# Altium PCB Dev Board.PcbDoc
Units mil, origin at the board's own origin, x right, y up, seen from the top; angles counter-clockwise.
Board outline 2312 x 2186 mil, 2 copper layers (Top Layer, Bottom Layer); 46 components, 71 nets, 229 pads, 70 vias.
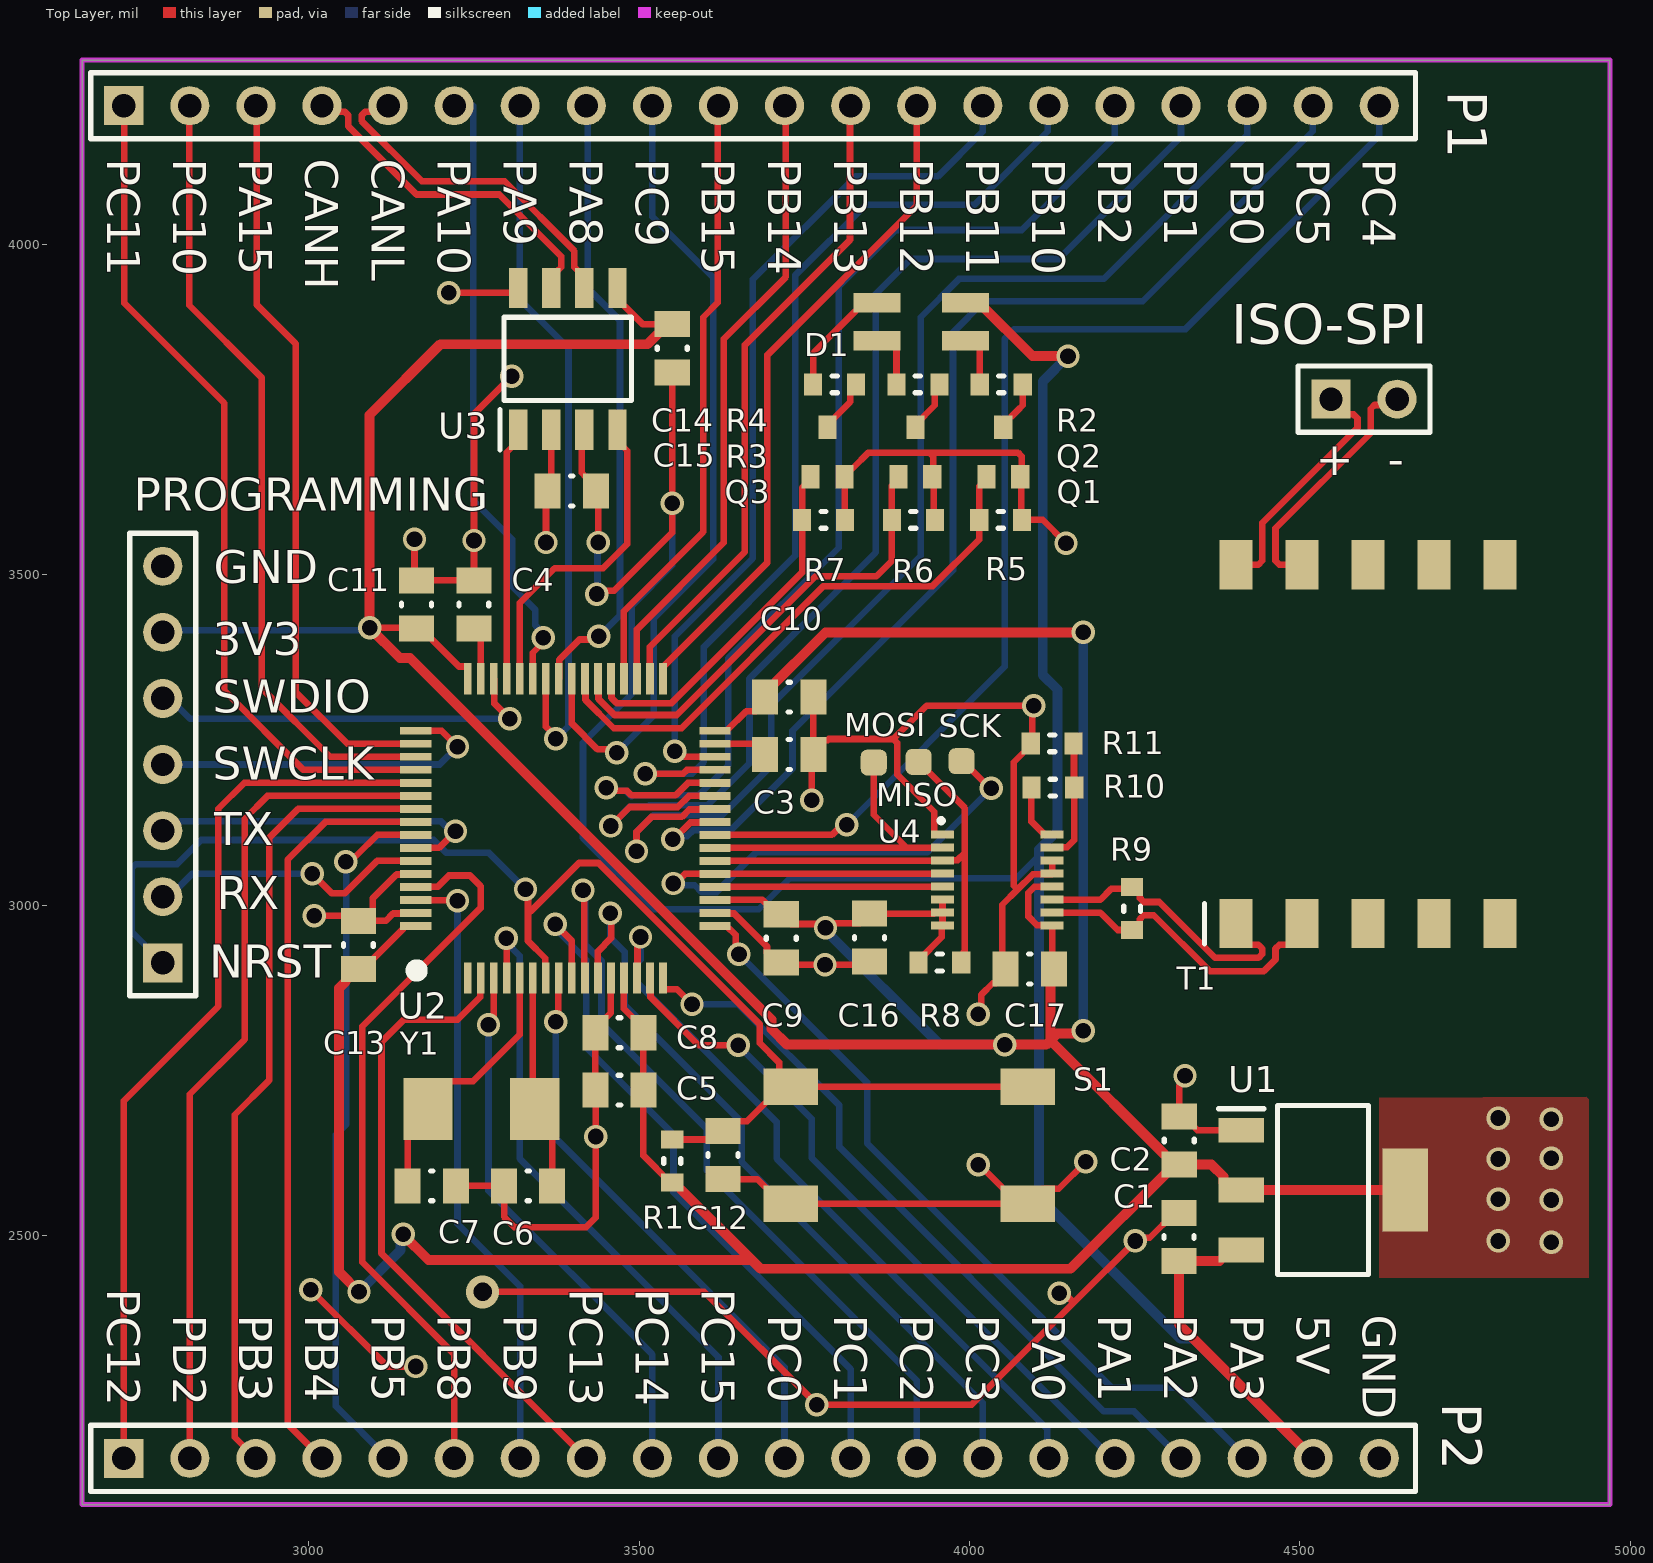
[diagram p0: Top Layer view]
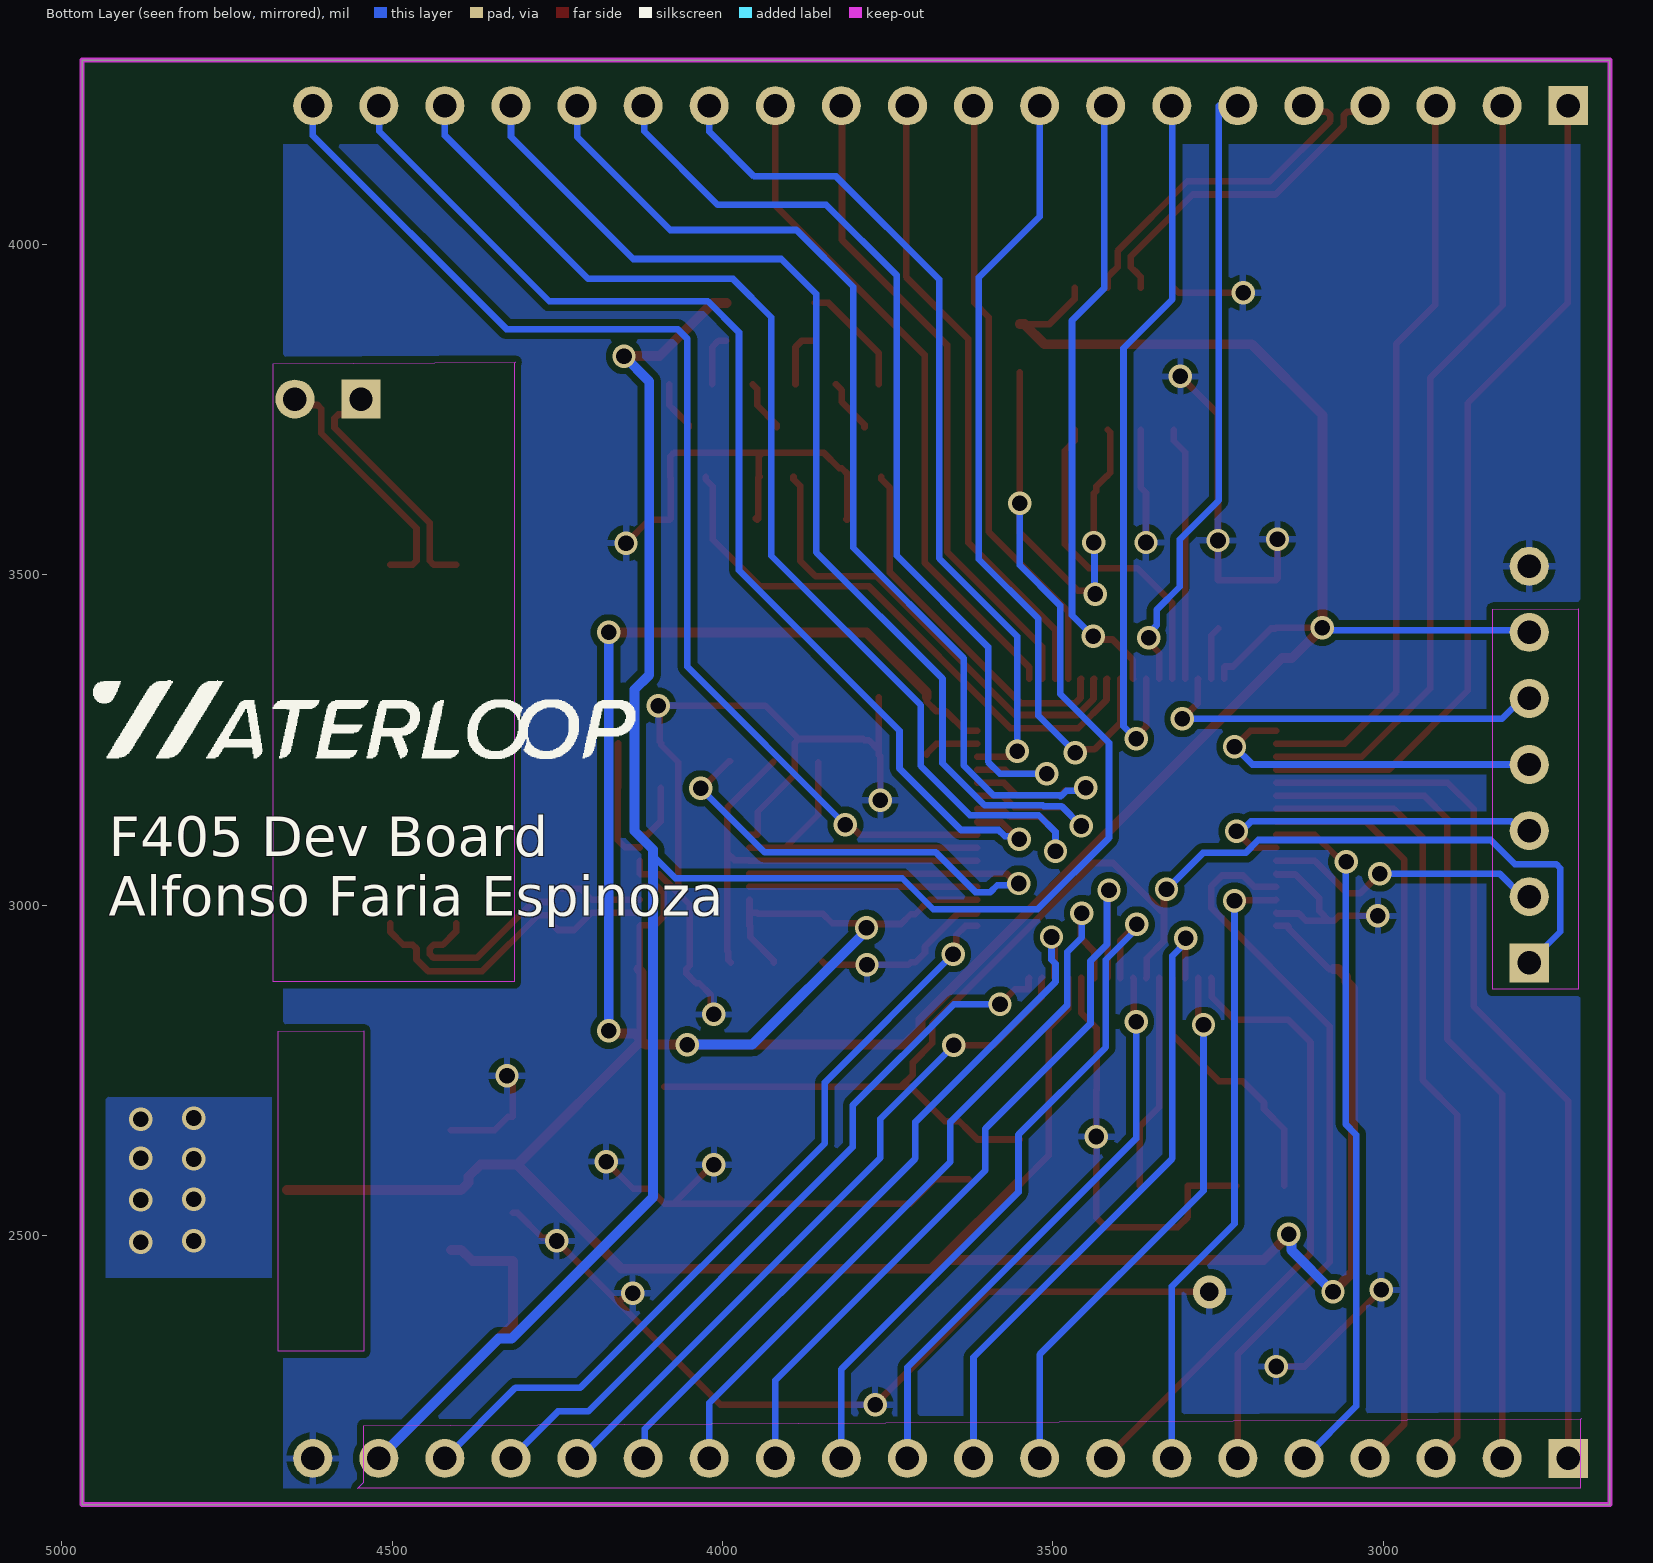
[diagram p1: Bottom Layer view, seen from below]
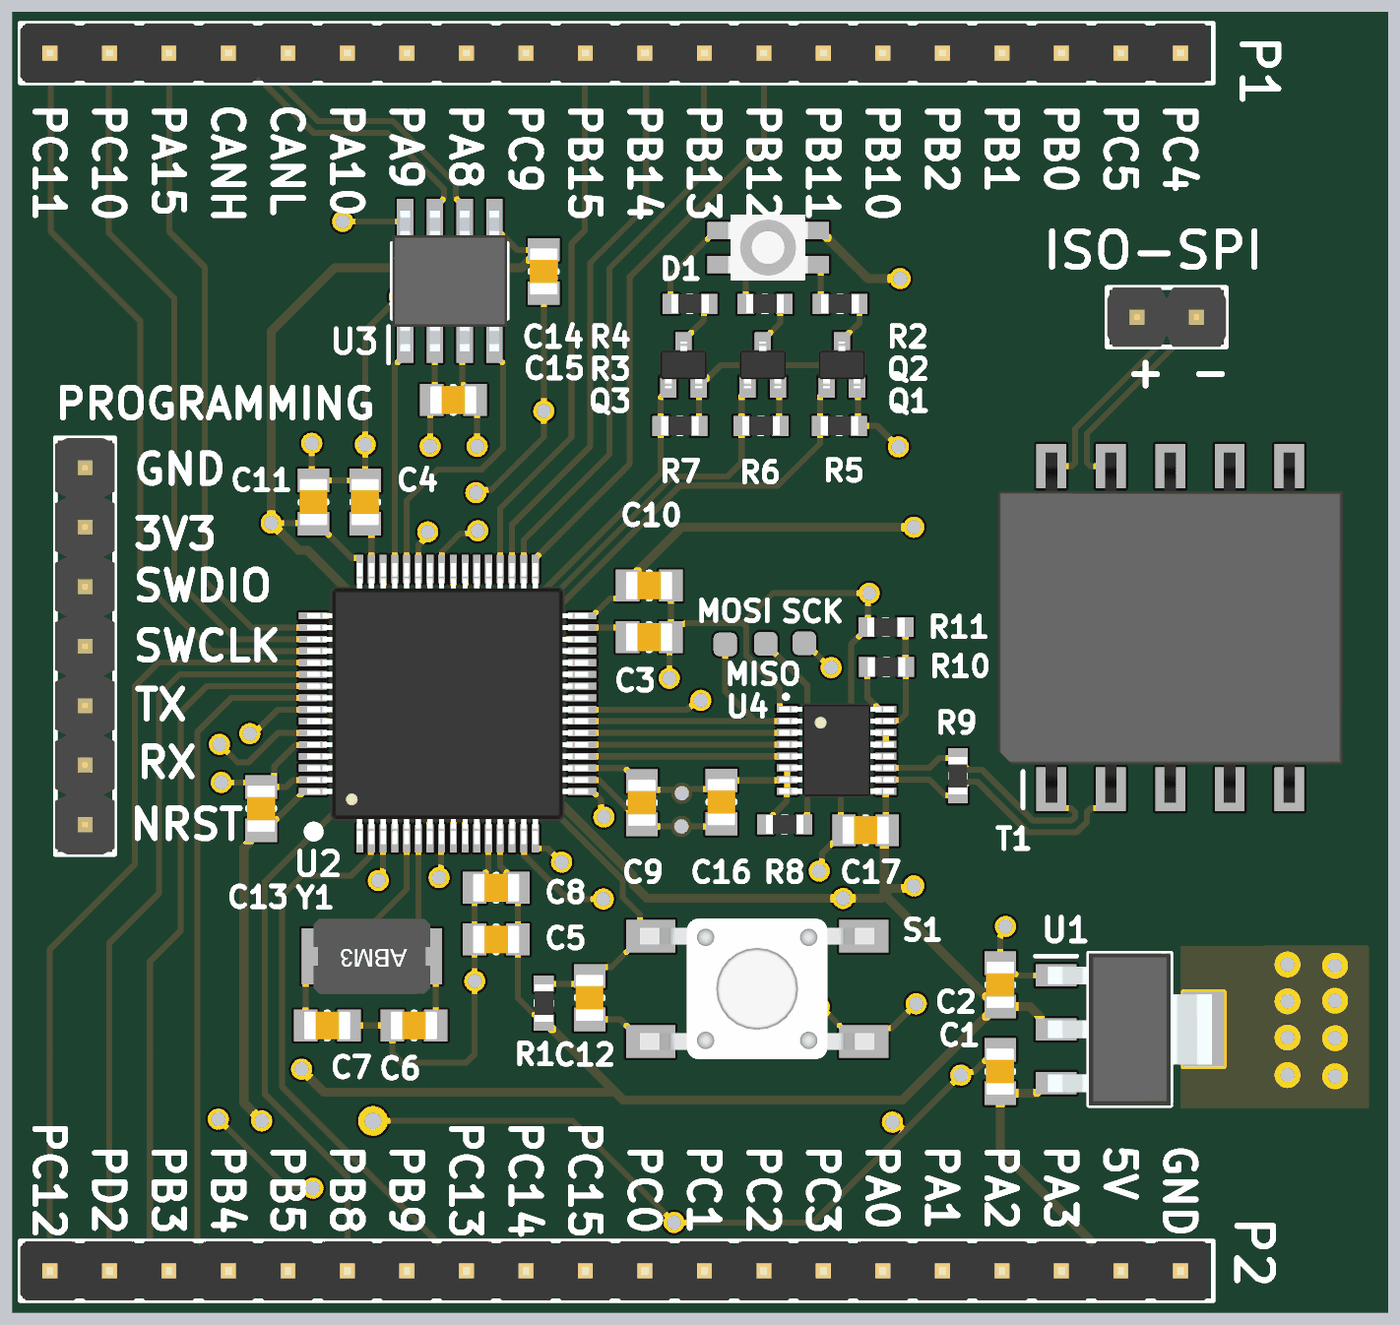
[diagram p2: 3D render of the assembled board from above, using the file's embedded part models]

## Layer stack, top to bottom
Top Solder: solder mask 0.4, Solder Resist, Dk 3.5
Top Layer: signal copper 1.4
Dielectric 1: dielectric 12.6, FR-4, Dk 4.8
Bottom Layer: signal copper 1.4
Bottom Solder: solder mask 0.4, Solder Resist, Dk 3.5

## Board outline
2657,2093 2657,4279 4969,4279 4969,2093

## Design rules (kind name [scope] priority, off if disabled: settings)
Clearance [All] p1: gap=10 ignorepadtopadclearanceinfootprint=FALSE except(0: Arc-Hole Track-Hole SMDPad-Hole THPad-Hole Via-Hole Fill-Hole Poly-Hole Region-Hole Text-Hole; 5: Arc-Arc Arc-Track Track-Track SMDPad-SMDPad; 7.87: Arc-SMDPad Track-SMDPad SMDPad-Fill SMDPad-Poly SMDPad-Region)
DiffPairsRouting [All] p1: maxlimit=10 minlimit=10 mostfreqgap=10 toplayer_minwidth=10 toplayer_maxwidth=15 toplayer_prefwidth=10 bottomlayer_minwidth=10 bottomlayer_maxwidth=15 bottomlayer_prefwidth=10 maxuncoupledlength=500
PolygonConnect PolygonConnect_4 [All vs IsNamedPolygon('3V3_L02_P005')] p1: thpad.connectstyle=Relief thpad.reliefconductorwidth=10 thpad.reliefentries=4 thpad.polygonreliefangle="90 Angle" thpad.airgapwidth=10 smdpad.connectstyle=Relief smdpad.reliefconductorwidth=10 smdpad.reliefentries=4 smdpad.polygonreliefangle="90 Angle" smdpad.airgapwidth=10 via.connectstyle=Direct via.reliefconductorwidth=10 via.reliefentries=4 via.polygonreliefangle="90 Angle" via.airgapwidth=10
PolygonConnect PolygonConnect_3 [All vs IsNamedPolygon('3V3_L01_P002')] p2: thpad.connectstyle=Relief thpad.reliefconductorwidth=10 thpad.reliefentries=4 thpad.polygonreliefangle="90 Angle" thpad.airgapwidth=10 smdpad.connectstyle=Direct smdpad.reliefconductorwidth=10 smdpad.reliefentries=4 smdpad.polygonreliefangle="90 Angle" smdpad.airgapwidth=10 via.connectstyle=Direct via.reliefconductorwidth=10 via.reliefentries=4 via.polygonreliefangle="90 Angle" via.airgapwidth=10
PolygonConnect PolygonConnect_2 [All vs IsNamedPolygon('3V3_L01_P002')] p3: thpad.connectstyle=Relief thpad.reliefconductorwidth=10 thpad.reliefentries=4 thpad.polygonreliefangle="90 Angle" thpad.airgapwidth=10 smdpad.connectstyle=Direct smdpad.reliefconductorwidth=10 smdpad.reliefentries=4 smdpad.polygonreliefangle="90 Angle" smdpad.airgapwidth=10 via.connectstyle=Relief via.reliefconductorwidth=10 via.reliefentries=4 via.polygonreliefangle="90 Angle" via.airgapwidth=10
PolygonConnect [All] p4: connectstyle=Relief reliefconductorwidth=10 reliefentries=4 polygonreliefangle="90 Angle" airgapwidth=10
PolygonConnect PolygonConnect_1 [All] p5: thpad.connectstyle=Relief thpad.reliefconductorwidth=10 thpad.reliefentries=4 thpad.polygonreliefangle="90 Angle" thpad.airgapwidth=10 smdpad.connectstyle=Direct smdpad.reliefconductorwidth=10 smdpad.reliefentries=4 smdpad.polygonreliefangle="90 Angle" smdpad.airgapwidth=10 via.connectstyle=Relief via.reliefconductorwidth=10 via.reliefentries=4 via.polygonreliefangle="90 Angle" via.airgapwidth=10
RoutingVias [All] p1: holewidth=19.68 width=39.37 viastyle="Through Hole" minholewidth=7.87 minwidth=23.62 maxholewidth=28 maxwidth=50
SilkToSolderMaskClearance [IsPad] p1: minsilkscreentomaskgap=5.91 clearancetoexposedcopper=TRUE
SolderMaskExpansion [All] p1: expansion=4 istentingtop=FALSE
Width [All] p1: maxlimit=15 minlimit=10 preferedwidth=15 toplayer_prefwidth=10 minimp=50.000000 maximp=50.000000 favimp=50.000000
28 further rules are at their usual default settings.

## Classes and differential pairs
differential pair class ISO: ISO-SPI
differential pair class CAN: CAN
net class PC[0..15]: PC0 PC1 PC2 PC3 PC4 PC5 PC6 PC7 PC8 PC9 PC10 PC11 PC12 PC13 PC14 PC15
net class PB[0..15]: PB0 PB1 PB2 PB3 PB4 PB5 PB6 PB7 PB8 PB9 PB10 PB11 PB12 PB13 PB14 PB15
net class PA[0..15]: PA0 PA1 PA2 PA3 PA4 PA5 PA6 PA7 PA8 PA9 PA10 PA11 PA12 PA13 PA14 PA15
component class MCU: C3 C4 C5 C6 C7 C8 C9 C10 C11 C12 C13 C14 C15 D1 MISO MOSI Q1 Q2 Q3 R1 R2 R3 R4 R5 R6 R7 S1 SCK U2 U3 Y1
component class Master: C1 C2 C16 C17 ISO-SPI P1 P2 PROGRAMMING R8 R9 R10 R11 T1 U1 U4
differential pair I: +I_P -I_N
differential pair ISO-SPI: +ISO-SPI_P -ISO-SPI_N
differential pair CAN: +CAN_P -CAN_N

## Components (designator, comment, footprint, x,y, rotation, side; value= is the part's Value field where it differs from the comment)
C1 "Capacitor - Nonpolarized" "0805 - Capacitor" 4317,2498 r270 top value=10uF
C2 "Capacitor - Nonpolarized" "0805 - Capacitor" 4317.31,2643.84 r270 top value=10uF
C3 "Capacitor - Nonpolarized" "0805 - Capacitor" 3727.18,3228.22 r180 top value=2.2uF
C4 "Capacitor - Nonpolarized" "0805 - Capacitor" 3249.78,3455.29 r270 top value=2.2uF
C5 "Capacitor - Nonpolarized" "0805 - Capacitor" 3470,2720.22 r180 top value=10nF
C6 "Capacitor - Nonpolarized" "0805 - Capacitor" 3332,2575.38 r0 top value=28pF
C7 "Capacitor - Nonpolarized" "0805 - Capacitor" 3186.16,2575.38 r180 top value=28pF
C8 "Capacitor - Nonpolarized" "0805 - Capacitor" 3470,2807 r180 top value=1uF
C9 "Capacitor - Nonpolarized" "0805 - Capacitor" 3715,2950 r270 top value=0.1uF
C10 "Capacitor - Nonpolarized" "0805 - Capacitor" 3727.18,3315 r0 top value=0.1uF
C11 "Capacitor - Nonpolarized" "0805 - Capacitor" 3163,3455.29 r90 top value=0.1uF
C12 "Capacitor - Nonpolarized" "0805 - Capacitor" 3627,2622 r270 top value=0.1uF
C13 "Capacitor - Nonpolarized" "0805 - Capacitor" 3075,2940 r90 top value=0.1uF
C14 "Capacitor - Nonpolarized" "0805 - Capacitor" 3550,3843 r270 top value=0.1uF
C15 "Capacitor - Nonpolarized" "0805 - Capacitor" 3398,3627 r0 top value=0.1uF
C16 "Capacitor - Nonpolarized" "0805 - Capacitor" 3848.53,2951 r90 top value=0.1uF
C17 "Capacitor - Nonpolarized" "0805 - Capacitor" 4091,2903.62 r0 top value=0.1uF
D1 "RGB LED- Common Anode" "4-PLCC RGB LED" 3927,3883.03 r180 top
ISO-SPI "ISO-SPI" HDR1X2 4547,3766 r0 top (schematic designator P4)
MISO "MISO" "Test Point" 3923,3217 r90 top (schematic designator TP2)
MOSI "MOSI" "Test Point" 3855,3216 r90 top (schematic designator TP3)
P1 "1x20 Header" HDR1X20 2720,4210 r0 top
P2 "1x20 Header" HDR1X20 2720,2163 r0 top
PROGRAMMING "PROGRAMMING" HDR1X7 2779,2913 r90 top (schematic designator P3)
Q1 "MOSFET-N" SC70/SOT323 4051,3686 r180 top value=2N7002
Q2 "MOSFET-N" SC70/SOT323 3918,3686 r180 top value=2N7002
Q3 "MOSFET-N" SC70/SOT323 3785,3686 r180 top value=2N7002
R1 "Resistor" "0603 - Resistor" 3550,2613 r270 top value=10K
R2 "Resistor" "0603 - Resistor" 4048,3788.37 r180 top value=220
R3 "Resistor" "0603 - Resistor" 3921.85,3788.37 r180 top value=220
R4 "Resistor" "0603 - Resistor" 3795.7,3788.37 r180 top value=510
R5 "Resistor" "0603 - Resistor" 4047,3583.31 r180 top value=10K
R6 "Resistor" "0603 - Resistor" 3915,3583.31 r180 top value=10K
R7 "Resistor" "0603 - Resistor" 3779,3583.31 r180 top value=10K
R8 "Resistor" "0603 - Resistor" 3955,2913.46 r180 top value=3K
R9 "Resistor" "0603 - Resistor" 4246,2995 r90 top value=120R
R10 "Resistor" "0603 - Resistor" 4126,3178 r180 top value=3K
R11 "Resistor" "0603 - Resistor" 4125,3245.1 r0 top value=1K
S1 "Switch - Push Button" "6x6mm Switch" 3908.66,2637 r0 top
SCK "CLOCK" "Test Point" 3988,3218 r90 top (schematic designator TP1)
T1 "HM2100NLT" HM2100NLT 4603,3244 r0 top
U1 "TLV1117-33IDCYR" TLV1117 4535,2569 r0 top
U2 "STM32F405RGT6" STM32F405RG 3388.27,3116.38 r0 top
U3 "TJA1051T_3,118" TJA1051T/3,118 3392,3827 r90 top
U4 "LTC6820" LTC6820 4042,3038 r270 top
Y1 "Oscillator" "2-SMD NO LEAD CRSYSTAL" 3261.16,2691.69 r180 top value=ABM3-16.000MHZ-B2-T

## Footprints (in the part's own frame and the unit in brackets; to place one, negate y for a bottom-side part, rotate by r counter-clockwise, add the part's x,y. Pads: shape width x height; smd on the part's side, far side on the other; paste and mask are expansions set on the pad)
"2-SMD NO LEAD CRSYSTAL" [mm]
  rect 1.9x2.4 smd: 1(-2.05,0) 2(2.05,0)
  body extent -2.5,-1.6 2.5,1.6, height 1.3
"4-PLCC RGB LED" [mm]
  rect 1.8x0.75 smd: 1(1.7,-0.725) 2(1.7,0.725) 3(-1.7,0.725) 4(-1.7,-0.725)
  body extent -1.75,-1.4 1.75,1.4, height 1.9
"6x6mm Switch" [mm]
  rect 2.1x1.4 smd: 1(-4.55,2.25) 1(4.55,2.25) 2(-4.55,-2.25) 2(4.55,-2.25)
  body extent -5,-3 5,3, height 5.12
"0603 - Resistor" [mm] "0603 Chip Resistor - IPC Medium Density"
  rect 0.7x0.85 smd: 1(-0.825,0) 2(0.825,0)
  silkscreen extent -0.1,-0.33 0.1,0.33, body extent -0.8,-0.4 0.8,0.4, height 0.45
"0805 - Capacitor" [mm] "0805 Chip Capacitor - IPC Medium Density"
  rect 1x1.35 smd: 1(-0.925,0) 2(0.925,0)
  silkscreen extent -0.05,-0.58 0.05,0.58, body extent -1,-0.6 1,0.6, height 1.2
HDR1X2 [mm] "Connector; Header; 2 Position"
  rect 1.5x1.5 hole 0.9: 1(0,0)
  round 1.5 hole 0.9: 2(2.54,0)
  silkscreen extent -1.27,-1.27 3.81,1.27, body extent -1.27,-1.27 3.81,1.27, height 8.54
HDR1X7 [mm] "Connector; Header; 7 Position"
  rect 1.5x1.5 hole 0.9: 1(0,0)
  round 1.5 hole 0.9: 2(2.54,0) 3(5.08,0) 4(7.62,0) 5(10.16,0) 6(12.7,0) 7(15.24,0)
  silkscreen extent -1.27,-1.27 16.51,1.27, body extent -1.27,-1.27 16.51,1.27, height 8.54
HDR1X20 [mm]
  rect 1.5x1.5 hole 0.9: 1(0,0)
  round 1.5 hole 0.9: 2(2.54,0) 3(5.08,0) 4(7.62,0) 5(10.16,0) 6(12.7,0) 7(15.24,0) 8(17.78,0) 9(20.32,0) 10(22.86,0) 11(25.4,0) 12(27.94,0) 13(30.48,0) 14(33.02,0) 15(35.56,0) 16(38.1,0) 17(40.64,0) 18(43.18,0) 19(45.72,0) 20(48.26,0)
  silkscreen extent -1.27,-1.27 49.66,1.27, body extent -1.27,-1.27 49.53,1.27, height 8.54
HM2100NLT [mm]
  rect 1.27x1.89 smd: 1(-5.08,-6.895) 2(-2.54,-6.895) 3(0,-6.895) 4(2.54,-6.895) 5(5.08,-6.895) 6(5.08,6.895) 7(2.54,6.895) 8(0,6.895) 9(-2.54,6.895) 10(-5.08,6.895)
  silkscreen extent -6.29,-7.69 -6.29,-6.14, body extent -7.35,-7.48 7.35,7.48, height 3.2
LTC6820 [mm]
  rect 0.305x0.889 smd: 1(-1.75,-2.106) 2(-1.25,-2.106) 3(-0.75,-2.106) 4(-0.25,-2.106) 5(0.25,-2.106) 6(0.75,-2.106) 7(1.25,-2.106) 8(1.75,-2.106) 9(1.75,2.106) 10(1.25,2.106) 11(0.75,2.106) 12(0.25,2.106) 13(-0.25,2.106) 14(-0.75,2.106) 15(-1.25,2.106) 16(-1.75,2.106)
  silkscreen extent -2.34,-2.21 -2.24,-2.11, body extent -2,-2.45 2,2.45, height 0.95
SC70/SOT323 [mm]
  rect 0.7x0.9 smd: 1(0.65,0.95) 2(0,-0.95) 3(-0.65,0.95)
  body extent -1,-1 1,1, height 1.05
STM32F405RG [mm]
  rect 0.3x1.2 smd: 1(-3.75,-5.75) 2(-3.25,-5.75) 3(-2.75,-5.75) 4(-2.25,-5.75) 5(-1.75,-5.75) 6(-1.25,-5.75) 7(-0.75,-5.75) 8(-0.25,-5.75) 9(0.25,-5.75) 10(0.75,-5.75) 11(1.25,-5.75) 12(1.75,-5.75) 13(2.25,-5.75) 14(2.75,-5.75) 15(3.25,-5.75) 16(3.75,-5.75) 33(3.75,5.75) 34(3.25,5.75) 35(2.75,5.75) 36(2.25,5.75) 37(1.75,5.75) 38(1.25,5.75) 39(0.75,5.75) 40(0.25,5.75) 41(-0.25,5.75) 42(-0.75,5.75) 43(-1.25,5.75) 44(-1.75,5.75) 45(-2.25,5.75) 46(-2.75,5.75) 47(-3.25,5.75) 48(-3.75,5.75)
  rect 1.2x0.3 smd: 17(5.75,-3.75) 18(5.75,-3.25) 19(5.75,-2.75) 20(5.75,-2.25) 21(5.75,-1.75) 22(5.75,-1.25) 23(5.75,-0.75) 24(5.75,-0.25) 25(5.75,0.25) 26(5.75,0.75) 27(5.75,1.25) 28(5.75,1.75) 29(5.75,2.25) 30(5.75,2.75) 31(5.75,3.25) 32(5.75,3.75) 49(-5.75,3.75) 50(-5.75,3.25) 51(-5.75,2.75) 52(-5.75,2.25) 53(-5.75,1.75) 54(-5.75,1.25) 55(-5.75,0.75) 56(-5.75,0.25) 57(-5.75,-0.25) 58(-5.75,-0.75) 59(-5.75,-1.25) 60(-5.75,-1.75) 61(-5.75,-2.25) 62(-5.75,-2.75) 63(-5.75,-3.25) 64(-5.75,-3.75)
  silkscreen extent -5.79,-5.54 -5.64,-5.39, body extent -6,-6 6,6, height 1.5
"Test Point" [mm] "Test Point"
  rrect50% 1x1 smd: 0(0,0)
TJA1051T/3,118 [mm] "SOIC127P600X175-8N"
  rect 1.55x0.7 smd: 1(-2.725,1.905) 2(-2.725,0.635) 3(-2.725,-0.635) 4(-2.725,-1.905) 5(2.725,-1.905) 6(2.725,-0.635) 7(2.725,0.635) 8(2.725,1.905)
  silkscreen extent -3.5,-2.45 1.6,2.61, body extent -3,-2.45 3,2.45, height 1.75
TLV1117 [mm] "SOT230P700X180-4N"
  rect 1.75x0.95 smd: 1(-3.15,2.3) 2(-3.15,0) 3(-3.15,-2.3)
  rect 1.75x3.2 smd: 2(3.15,0)
  silkscreen extent -4.03,-3.25 1.75,3.25, body extent -3.5,-3.25 3.5,3.25, height 1.8

## Part data
C1 C2 C3 C4 C5 C6 C7 C8 C9 C10 C11 C12 C13 C14 C15 C16 C17: "Nonpolarized Capacitor"
ISO-SPI: library part "1x2 Header", "1x2 Pin Header"
MISO MOSI SCK: library part "Test Point", "Test Point"
P1 P2: "1x20 Pin Header"
PROGRAMMING: library part "1x7 Header", "1x7 Pin Header"
Q1 Q2 Q3: "N-Channel MOSFET"
S1: "Push Button Switch"
T1: "Pulse Transformer 1:1 Surface Mount 150µH, 450µH", Manufacturer="Pulse Electronics", Supplier Part Number=1840-1032-1-ND, Datasheet=https://productfinder.pulseeng.com/doc_type/WEB301/doc_num/HM2100NL/doc_part/HM2100NL.pdf, Manufacturer Part Number=HM2100NLT, Supplier=Digikey
U1: "Linear Voltage Regulator IC 3.3V 800MA SOT223-4", Manufacturer="Texas Instruments", Supplier Part Number=296-21112-1-ND, Datasheet=http://www.ti.com/lit/ds/symlink/tlv1117.pdf?HQS=TI-null-null-digikeymode-df-pf-null-wwe&ts=1590668900314, Manufacturer Part Number=TLV1117-33IDCYR, Supplier=Digikey
U2: "ST 64-pin Micro"
U3: "CAN Transceiver IC 4.5V-5.5V 250ns", Manufacturer=NXP, Manufacturer Part Number=TJA1051T/3,118, Supplier Part Number=568-8684-1-ND, Datasheet=http://www.nxp.com/docs/en/data-sheet/TJA1051.pdf, Supplier=Digikey
U4: Manufacturer="Analog Devices", Manufacturer Part Number=LTC6820IMS#TRPBF, Supplier Part Number=LTC6820IMS#TRPBFCT-ND, Supplier=Digikey
Y1: "Crystal Oscillator"

## Via types
v1: diameter 35.43, hole 23.62, Top Layer to Bottom Layer, 69 vias
v2: diameter 50, hole 28, Top Layer to Bottom Layer, 1 vias

## Nets (pads, with @x,y where several pads share a name; then routed paths per layer and width w, separated by ;. In a path a pad name is that pad's centre, name@x,y a point inside that pad or via, vN(x,y) a via of type N, cw(c..) or ccw(c..) an arc to the next point about the centre after c; other vN are vias at no path point)
3V3: C2.2 C5.1 C8.1 C9.1 C10.1 C11.1 C13.1 C14.1 C16.2 C17.2 PROGRAMMING.6 R1.2 R8.2 U1.2 U2.13 U2.19 U2.32 U2.48 U2.64 U3.5 U4.6 U4.7 U4.8 U4.9 U4.12 | length 8313.3
  Top Layer w10: C13.1 3081.89,2903.58 3143.27,2964.96 3143.27,2967.83 3144.17,2968.74 U2.64 ; v1(3092,3420) 3161.87,3420 C11.1 3169.89,3418.87 3227.38,3361.38 3239.72,3361.38 3240.63,3360.47 U2.48 ; U3.5 3467,3917.55 3505.55,3879 C14.1@3542.69,3879 ; U2.13 3476.85,2843.45 3506.42,2813.89 C8.1 C5.1 3506.42,2621.15 3547.05,2580.52 R1.2 ; C14.1 C14.1@3551,3880.42 ; U2.19 3686.42,3008.11 3708.11,2986.42 C9.1 3729.69,2971.73 3769.27,2971.73 3775.12,2965.88 3788.88,2965.88 3795.73,2972.73 3833.85,2972.73 C16.2 3946.22,2987.42 3947.59,2988.79 U4.7 ; U2.32 3632.36,3264.02 3661.77,3293.43 3676.07,3293.43 3690.76,3308.11 C10.1 ; R8.2 3922.52,2916.42 3958,2951.9 3958,2968.1 3959,2969.1 U4.8 U4.7 ; U4.6 U4.7 ; U4.12 4098.16,3028.16 4089,3019 4089,2982.99 4102.08,2969.91 4124.11,2969.91 U4.9 4124.91,2906.12 C17.2
  Top Layer w15: C13.1 3068.11,2903.58 3055.93,2891.4 3055.93,2884.51 3046,2874.58 3046,2445 v1(3076,2415) ; v1(3143,2502) 3143,2501 3181,2463 3670.47,2463 ; R1.2 3552.95,2580.52 3670.47,2463 ; C14.1 3543.11,3879.42 3542.69,3879 3512.69,3849 3199,3849 3092,3742 v1(3092,3420) 3138,3374 3153.2,3374 3700.22,2826.98 3700.22,2812.78 3724,2789 v1(4053,2789) 4115.99,2789 4122.42,2795.43 ; C10.1 3690.76,3321.89 3781.87,3413 v1(4172,3413) ; C17.2 4122.42,2898.62 4122.42,2795.43 ; v1(4172,2810) 4168.09,2806.09 4133.08,2806.09 4122.42,2795.43 ; U1.2@4659.02,2569 4410.98,2569 4395.24,2569 4384.04,2580.2 4384.04,2589.77 4366.39,2607.42 C2.2 C2.2@4310.42,2607.42 ; 3670.47,2463 3683.47,2450 4153,2450 C2.2@4310.42,2607.42 ; 4122.42,2795.43 C2.2@4310.42,2607.42
  Bottom Layer w10: PROGRAMMING.6 2782.5,3416.5 3088.5,3416.5 v1(3092,3420)
  Bottom Layer w15: v1(3076,2415) 3139.09,2478.09 3139.09,2498.09 v1(3143,2502) ; v1(3782,2965.88) 3782,2962 3955,2789 v1(4053,2789) ; v1(4172,2810) v1(4172,3413)
  other v1: 4880,2490 4800,2492 4880,2554 4800,2555 4800,2616 4880,2617 4880,2676 4800,2678
5V: C1.2 C14.2 C15.2 D1.4 P2.19 U1.3 U3.3 | length 4547.9
  Top Layer w10: U3.3 3413.03,3715.74 3413.03,3654.43 3418.88,3648.57 3419.73,3648.57 3434.42,3633.89 C15.2 3438,3623.42 v1(3438,3549) ; v1(3436,3471) 3440.87,3475.87 3461.87,3475.87 3550,3564 v1(3550,3608.34) C14.2
  Top Layer w15: D1.4 4014.6,3911.57 4095.17,3831 v1(4149,3831) ; U1.3 4395.24,2478.45 4378.37,2461.58 C1.2 4317,2366 P2.19
  Bottom Layer w10: v1(3436,3471) 3437,3472 3437,3548 v1(3438,3549) ; v1(3550,3608.34) 3550,3514.73 3489,3453.73 3489,3320 3415,3246 3415,3102 3523,2994 3681,2994 3728,3041 4071,3041 4105,3075
  Bottom Layer w15: v1(4149,3831) 4110.78,3792.78 4110.78,3348.65 4133,3326.44 4133,3112.5 4105,3084.5 4105,3075 4105,2558.2 4318.77,2344.42 4338.58,2344.42 P2.19
B: Q1.2 R2.1 | length 77.3
  Top Layer w10: Q1.2 4051,3727.34 4073.23,3749.57 4073.41,3749.57 4080.48,3756.64 R2.1
BLUE: Q1.1 R5.2 U2.39 | length 863.8
  Top Layer w10: U2.39 3418.7,3341.85 3418.7,3310.75 3461.45,3268 3564,3268 3779,3483 3944,3483 4014.54,3553.54 R5.2 ; R5.2 4014.52,3633.77 4025.41,3644.66 Q1.1
CAN-RX: U2.44 U3.4 | length 493.5
  Top Layer w10: U2.44 3319.37,3457.37 3372,3510 3445.27,3510 3482,3546.73 3482,3687.98 3467,3702.98 U3.4
CAN-TX: U2.45 U3.1 | length 384.1
  Top Layer w10: U2.45 3299.68,3685.67 3317,3702.98 U3.1
CAN_N: P1.5 U3.6 | length 528.4
  Top Layer w10: P1.5@3109,4195.31 P1.5@3114.86,4201.17 ; P1.5 3111.17,4201.17 3085.86,4201.17 3080,4195.31 3080,4187.03 3171.41,4095.62 3296.45,4095.62 3402,3990.07 3402,3965.65 3407.86,3959.8 3408.22,3959.8 3417,3951.02 U3.6
CAN_P: P1.4 U3.7 | length 520.2
  Top Layer w10: P1.4 3028.83,4201.17 3054.14,4201.17 3060,4195.31 3060,4178.74 3163.13,4075.62 3288.16,4075.62 3382,3981.78 3382,3965.65 3376.14,3959.8 3375.78,3959.8 3367,3951.02 U3.7
G: Q2.2 R3.1 | length 80
  Top Layer w10: Q2.2 3918,3727.34 3947.3,3756.64 3947.3,3781.35 R3.1
GND: C1.1 C2.1 C3.1 C4.1 C5.2 C6.1 C7.1 C8.2 C9.2 C10.2 C11.2 C12.2 C13.2 C15.1 C16.1 C17.1 P2.20 PROGRAMMING.7 Q1.3 Q2.3 Q3.3 R5.1 R6.1 R7.1 R11.1 S1.2 U1.1 U2.12 U2.18 U2.60 U2.63 U3.2 U3.8 U4.1 U4.13 U4.14 | length 6227.1
  Top Layer w10: v1(3003,2418) 3119,2302 v1(3162,2302) ; v1(3008,2984) 3067.42,2984 C13.2 C13.2@3081.89,2976.42 ; v1(3160,3554) 3160,3494.7 C11.2 C4.1 3250,3491.92 v1(3250,3552) 3250,3743.34 v1(3307,3800.34) ; U2.63 3160.98,2987.52 3127.68,2987.52 3116.57,2976.42 C13.2@3081.89,2976.42 ; U2.60 3160.98,3046.57 3132.94,3046.57 3096.57,3010.21 3096.57,2991.1 C13.2@3081.89,2976.42 ; v1(3212,3927) 3309.72,3927 U3.8 ; C7.1 C6.1 3295.58,2528.42 3311,2513 3420,2513 3434,2527 v1(3434,2650) 3434,2719.8 C5.2 C8.2 3433.58,2813.89 3457.17,2837.47 U2.12 ; v2(3263,2415) 3598.34,2415 v1(3769,2244.34) 4003.34,2244.34 4160,2401 ; v1(3359,3549) 3359,3624.42 C15.1 3367,3632.42 U3.2 ; U2.18 3615.55,2987.52 3643.6,2987.52 3693.43,2937.69 3693.43,2928.27 3708.11,2913.58 C9.2 3718.58,2910 3843.95,2910 C16.1 ; C12.2 3678.58,2585.58 3715.75,2548.42 3729.53,2548.42 S1.2@4074.02,2548.42 ; v1(3761,3159) 3761,3225.63 C3.1 C3.1@3763.59,3235.11 ; C10.2 C3.1@3763.59,3235.11 ; R7.1@3812.24,3584.07 R7.1 3811.04,3583.76 3811.04,3648.15 Q3.3 3810.59,3652.54 3819.37,3661.32 3823.31,3661.32 3846.99,3685 3939.14,3685 ; R6.1@3949.44,3585.27 R6.1 3945.54,3585.26 3945.54,3646.65 Q2.3 3945,3650.01 3945,3679.14 3939.14,3685 ; U4.1 3947.59,3106.9 3946.59,3107.9 3946.59,3141.6 3890.44,3197.75 3890.44,3245.7 3884.58,3251.56 ; v1(4013,2607.34) 4015.09,2607.34 S1.2@4074.02,2548.42 ; v1(4013,2835) 4017.87,2839.87 4017.87,2864.87 4035.05,2882.05 4039.9,2882.05 4054.58,2896.73 C17.1 4049.58,2908.62 4049.58,3000.8 4072.7,3023.92 ; U4.14 U4.13 4124.11,3047.04 4095.82,3047.04 4072.7,3023.92 ; v1(4136,2413) 4142.88,2413 4154.88,2401 4160,2401 ; v1(4146,3548) 4110.69,3583.31 R5.1 4078.04,3584.76 4078.04,3647.15 4079,3648.12 4079,3679.14 4073.14,3685 3939.14,3685 ; v1(4176,2612) 4134.98,2570.98 4110.36,2570.98 4087.8,2548.42 S1.2@4074.02,2548.42 ; C1.1 4310.11,2534.42 4272.56,2496.87 4255.87,2496.87 v1(4251,2492) 4160,2401 ; v1(4326,2742) 4326,2735.12 4317.31,2726.43 C2.1 4324.2,2680.25 4344.91,2659.55 U1.1 ; C3.1@3763.59,3235.11 3778.28,3249.79 3785.17,3249.79 3786.93,3251.56 3884.58,3251.56 ; 3884.58,3251.56 3935.02,3302 v1(4097,3302) 4094.76,3299.76 4094.76,3247.34 R11.1 4092.52,3242.14 4066.87,3216.49 4066.87,3029.75 4072.7,3023.92
  other v1: 3781.27,2910
GREEN: Q2.1 R6.2 U2.38 | length 712.9
  Top Layer w10: U2.38 3438.39,3341.85 3438.39,3312.27 3462.66,3288 3557,3288 3767,3498 3859,3498 3882.52,3521.52 R6.2 3882.52,3634.77 3892.41,3644.66 Q2.1
I_N: R9.1 T1.2 U4.10 | length 484.7
  Top Layer w10: U4.10 4198,2988.79 4224.27,2962.52 R9.1 4248.95,2962.52 4257.73,2971.3 4257.73,2979.14 4263.59,2985 4278.84,2985 4363.5,2900.34 4445.43,2900.34 4463,2917.91 4463,2934.48 4468.86,2940.34 4483,2940.34 4503,2960.34 T1.2
I_P: R9.2 T1.1 U4.11 | length 448.6
  Top Layer w10: U4.11 4198,3008.47 4214.27,3024.74 4243.26,3024.74 R9.2 4248.95,3027.48 4257.73,3018.7 4257.73,3010.86 4263.59,3005 4287.13,3005 4371.79,2920.34 4437.14,2920.34 4443,2926.2 4443,2934.48 4437.14,2940.34 4423,2940.34 4403,2960.34 T1.1
ISO-SPI_N: ISO-SPI.2 T1.9 | length 378.2
  Top Layer w10: T1.9 4468.86,3515.46 4463,3521.31 4463,3570.44 4607,3714.44 4607,3751.31 4612.86,3757.17 4638.17,3757.17 ISO-SPI.2
ISO-SPI_P: ISO-SPI.1 T1.10 | length 369.7
  Top Layer w10: T1.10 4437.14,3515.46 4443,3521.31 4443,3578.73 4587,3722.73 4587,3736.94 4581.14,3742.8 4570.2,3742.8 ISO-SPI.1
NetC3_2: C3.2 U2.31 | length 83.6
  Top Layer w10: U2.31 3676.07,3244.33 3690.76,3229.65 C3.2
NetC4_2: C4.2 U2.47 | length 80.5
  Top Layer w10: C4.2 3260.31,3408.34 U2.47
NetD1_1: D1.1 R4.2 | length 175.4
  Top Layer w10: R4.2 3763.22,3835.39 3839.4,3911.57 D1.1
NetD1_2: D1.2 R3.2 | length 89.7
  Top Layer w10: D1.2 3879.6,3854.48 3889.37,3844.72 R3.2
NetD1_3: D1.3 R2.2 | length 82
  Top Layer w10: D1.3 4005.76,3854.48 4015.52,3844.72 R2.2
NetR8_1: MISO.0 R8.1 U2.22 U4.3 | length 718.2
  Top Layer w10: U2.22 3614.83,3067.35 3958.91,3067.35 U4.3 3959.89,3068.33 3981.92,3068.33 3993,3079.42 ; MISO.0 3993,3147 3993,3079.42 ; R8.1 3991.27,2917.25 3991.27,2929.32 3993,2931.05 3993,3079.42
NetR10_1: R10.1 R11.2 U4.15 | length 185.1
  Top Layer w10: U4.15 4125.72,3088.02 4147.75,3088.02 4158.48,3098.75 R10.1 4157.98,3178.5 4157.98,3244.6 R11.2
NetR10_2: R10.2 U4.16 | length 90.8
  Top Layer w10: R10.2 4093.52,3126.8 4113.42,3106.9 U4.16
NetTP1_0: SCK.0 U2.21 U4.4 | length 1027.8
  Top Layer w10: v1(3551.44,3033) 3554.88,3033 3569.36,3047.48 U2.21 3614.83,3047.66 3958.91,3047.66 U4.4 ; SCK.0 3990,3218 4031,3177 v1(4033,3177)
  Bottom Layer w10: v1(3551.44,3033) 3554.16,3030.28 3584.16,3030.28 3594.44,3020 3617,3020 3677,3080 3936,3080 v1(4033,3177)
NetTP3_0: MOSI.0 U2.23 U4.2 | length 494.3
  Top Layer w10: U2.23 3614.83,3087.03 3904.97,3087.03 ; MOSI.0 3855,3137 3904.97,3087.03 ; U4.2 3958.91,3087.03 3904.97,3087.03
NetU2_20: U2.20 U4.5 | length 344.6
  Top Layer w10: U2.20 3614.83,3027.98 3958.91,3027.98 U4.5
OSC-IN: C6.2 U2.6 Y1.1 | length 326.8
  Top Layer w10: U2.6 3339.06,2694.51 Y1.1 3368.42,2665.14 C6.2
OSC-OUT: C7.2 U2.5 Y1.2 | length 406
  Top Layer w10: C7.2 3149.75,2660.98 Y1.2 3180.45,2701.53 3212.86,2733.93 3248.93,2733.93 3319.37,2804.37 U2.5
PA0: P2.15 U2.14 | length 1114.2
  Top Layer w10: U2.14 3497.44,2890.91 3497.44,2947.44 v1(3502,2952)
  Bottom Layer w10: v1(3502,2952) 3502,2917.56 3496,2911.56 3496,2884 3708,2672 3708,2617 4117.47,2207.53 4117.47,2165.53 P2.15
PA1: P2.16 U2.15 | length 1055.9
  Top Layer w10: U2.15 3517.13,2889.09 3517.13,2861.05 3590.17,2788 v1(3650,2788)
  Bottom Layer w10: v1(3650,2788) 3761,2677 3761,2618 4216,2163 P2.16
PA2: P2.17 U2.16 | length 1131.5
  Top Layer w10: U2.16 3536.81,2889.09 3536.81,2873.13 3556.87,2873.13 v1(3580,2850)
  Bottom Layer w10: v1(3580,2850) 3650,2850 3803,2697 3803,2634 4203,2234 4249,2234 P2.17
PA3: P2.18 U2.17 | length 1207.1
  Top Layer w10: U2.17 3632.36,2968.74 3646.13,2954.97 3646.13,2930.87 v1(3651,2926)
  Bottom Layer w10: v1(3651,2926) 3845,2732 3845,2640 4215,2270 4313,2270 P2.18
PA8: P1.8 U2.41 | length 932.4
  Top Layer w10: U2.41 3379.33,3343.66 3379.33,3371.71 3409.75,3402.13 3434.13,3402.13 v1(3439,3407)
  Bottom Layer w10: P1.8@3422,4202.24 3422,3934 3471,3885 3471,3439 v1(3439,3407)
PA9: P1.7 U2.42 | length 1095.2
  Top Layer w10: U2.42 3358.74,3270.57 3374,3255.31 v1(3374,3252)
  Bottom Layer w10: P1.7@3319,4211.57 3319,3917 3393,3843 3393,3271 v1(3374,3252)
PA10: P1.6 U2.43 | length 917.8
  Top Layer w10: U2.43 3339.06,3382.17 3355,3398.12 v1(3355,3405)
  Bottom Layer w10: P1.6@3249,4210 3249,3612.73 3308,3553.73 3308,3482 3343,3447 3343,3423.57 3355,3411.57 v1(3355,3405)
PA15: P1.3 U2.50 | length 1127.4
  Top Layer w10: P1.3@2921,4211.51 2921,3909 2980,3850 2980,3323 3058.67,3244.33 U2.50
PB0: P1.18 U2.26 | length 1862
  Top Layer w10: v1(3496,3082) 3496,3111 3518.72,3133.72 3564.62,3133.72 3575.91,3145 3613.74,3145 U2.26
  Bottom Layer w10: v1(3496,3082) 3496,3111 3521.28,3136.28 3625.28,3136.28 3700,3211 3700,3303 3926,3529 3926,3890 3984,3948 4203,3948 4420,4165 P1.18
PB1: P1.17 U2.27 | length 1822.6
  Top Layer w10: v1(3457,3120) 3485.72,3148.72 3558.41,3148.72 3575.29,3165.59 U2.27
  Bottom Layer w10: v1(3457,3120) 3487.09,3150.09 3513.87,3150.09 3515.07,3151.28 3603.28,3151.28 3667,3215 3667,3343 3858,3534 3858,3925 3911,3978 4135,3978 4320,4163 P1.17
PB2: P1.16 U2.28 | length 1739.3
  Top Layer w10: v1(3450,3178) 3454.87,3173.13 3481.75,3173.13 3488.6,3166.28 3554.76,3166.28 3573.76,3185.28 U2.28
  Bottom Layer w10: v1(3450,3178) 3454.87,3173.13 3479.67,3173.13 3487.72,3165.09 3488.87,3165.09 3490.07,3166.28 3589.28,3166.28 3635,3212 3635,3374 3802,3541 3802,3936 3888,4022 4079,4022 4220,4163 P1.16
PB3: P2.3 U2.55 | length 1213.9
  Top Layer w10: P2.3 2888,2195 2888,2683 2940,2735 2940,3102 2983.91,3145.91 U2.55
PB4: P2.4 U2.56 | length 1145.1
  Top Layer w10: P2.4 2968,2215 2968,3069 3025.22,3126.22 U2.56
PB5: P2.5 U2.57 | length 1065.7
  Top Layer w10: v1(3056,3066) 3062.88,3066 3072.52,3075.63 3072.63,3075.63 3103.54,3106.54 U2.57
  Bottom Layer w10: v1(3056,3066) 3057,3065 3057,2668.84 3040.72,2652.56 3040.72,2242.28 P2.5
PB8: P2.6 U2.61 | length 1109.6
  Top Layer w10: U2.61 3194.8,3027.8 3212,3045 3244,3045 3260,3029 3260,2995.73 3081,2816.73 3081,2460 3220,2321 P2.6
PB9: P2.7 U2.62 | length 946.9
  Top Layer w10: U2.62 3162.44,3007.56 3224.44,3007.56 v1(3225,3007)
  Bottom Layer w10: v1(3225,3007) 3225,2518 3320,2423 P2.7
PB10: P1.15 U2.29 | length 1509.9
  Top Layer w10: v1(3509,3199) 3566.27,3199 3572.23,3204.96 U2.29
  Bottom Layer w10: v1(3509,3199) 3580,3199 3598,3217 3598,3391 3736,3529 3736,3953 3843,4060 4007,4060 4118.33,4171.33 4118.33,4208.33 P1.15
PB11: P1.14 U2.30 | length 1306.8
  Top Layer w10: v1(3554,3233) 3560.88,3233 3569.24,3224.65 U2.30
  Bottom Layer w10: v1(3554,3233) 3554,3407 3672,3525 3672,3947 3828,4103 3952,4103 4020,4171 P1.14
PB12: P1.13 U2.33 | length 1012.6
  Top Layer w10: U2.33 3535.91,3360.47 3694,3518.57 3694,3833 3920,4059 P1.13@3920,4196.26
PB13: P1.12 U2.34 | length 981.7
  Top Layer w10: U2.34 3516.22,3391.22 3660,3535 3660,3848 3819,4007 P1.12@3819,4199.03
PB14: P1.11 U2.35 | length 953.7
  Top Layer w10: U2.35 3496.54,3417.54 3628,3549 3628,3857 3722,3951 P1.11@3722,4203.1
PB15: P1.10 U2.36 | length 923.8
  Top Layer w10: U2.36 3476.85,3444.85 3597,3565 3597,3890 3619,3912 P1.10@3619,4207.63
PC0: P2.11 U2.8 | length 872.2
  Top Layer w10: v1(3374,2824) 3377.52,2827.52 3377.52,2889.09 U2.8
  Bottom Layer w10: v1(3374,2824) 3374,2647 3720,2301 P2.11
PC1: P2.12 U2.9 | length 1084.6
  Top Layer w10: v1(3373,2971) 3398.11,2945.89 U2.9
  Bottom Layer w10: v1(3373,2971) 3373,2964.52 3420,2917.52 3420,2785 3552,2653 3552,2566 3820,2298 P2.12
PC2: P2.13 U2.10 | length 1203.3
  Top Layer w10: v1(3415,3023) 3416.89,3021.11 3416.89,2890.91 U2.10
  Bottom Layer w10: v1(3415,3023) 3418,3020 3418,2940.73 3443,2915.73 3443,2821 3602,2662 3602,2599 3920,2281 P2.13
PC3: P2.14 U2.11 | length 1165.5
  Top Layer w10: U2.11 3437.48,2930.25 3457.51,2950.28 3457.51,2986.49 v1(3456,2988)
  Bottom Layer w10: v1(3456,2988) 3456,2951.73 3478,2929.73 3478,2849 3655,2672 3655,2612 4020,2247 P2.14
PC4: P1.20 U2.24 | length 1779.3
  Top Layer w10: U2.24 3791.65,3106.54 3807.12,3122 v1(3814,3122)
  Bottom Layer w10: v1(3814,3122) 4053,3361 4053,3857 4068,3872 4327,3872 4620,4165 P1.20
PC5: P1.19 U2.25 | length 1769.8
  Top Layer w10: v1(3551,3100) 3552.12,3100 3577.44,3125.32 3613.74,3125.32 U2.25
  Bottom Layer w10: v1(3551,3100) 3555.63,3104.63 3572.63,3104.63 3582,3114 3639,3114 3732,3207 3732,3264 3975,3507 3975,3867 4022,3914 4262,3914 4519.33,4171.33 4519.33,4209.33 P1.19
PC9: P1.9 U2.40 | length 1228.4
  Top Layer w10: U2.40 3398.11,3274.89 3437.13,3235.87 3461.13,3235.87 v1(3466,3231)
  Bottom Layer w10: v1(3466,3231) 3522,3287 3522,3433.79 3612,3523.79 3612,3950 3520,4042 P1.9@3520,4206.88
PC10: P1.2 U2.51 | length 1196.8
  Top Layer w10: P1.2@2819,4203.56 2819,3908 2929,3798 2929,3328 3032.35,3224.65 U2.51
PC11: P1.1 U2.52 | length 1281.4
  Top Layer w10: P1.1@2721,4204.28 2721,3911 2872,3760 2872,3325 2992.04,3204.96 U2.52
PC12: P2.1 U2.53 | length 1357.4
  Top Layer w10: P2.1 2720,2704 2863,2847 2863,3146 2902.28,3185.28 U2.53
PC13: P2.8 U2.2 | length 965.3
  Top Layer w10: U2.2 3259.41,2889.09 3259.41,2861.05 3225.36,2827 3144,2827 3110,2793 3110,2473 P2.8
PC14: P2.9 U2.3 | length 833
  Top Layer w10: v1(3272,2819) 3272,2825.88 3280,2833.88 U2.3
  Bottom Layer w10: v1(3272,2819) 3272,2568 3520,2320 P2.9
PC15: P2.10 U2.4 | length 980.2
  Top Layer w10: v1(3299,2950) 3299.34,2949.66 3299.34,2890.34 U2.4
  Bottom Layer w10: v1(3299,2950) 3299,2943.73 3319,2923.73 3319,2617 3620,2316 P2.10
PD2: P2.2 U2.54 | length 1275.6
  Top Layer w10: P2.2 2820,2714 2903,2797 2903,3131 2937.59,3165.59 U2.54
R: Q3.2 R4.1 | length 82.9
  Top Layer w10: Q3.2 3785,3727.34 3819.4,3761.74 3819.4,3779.59 R4.1
RED: Q3.1 R7.2 U2.37 | length 553.2
  Top Layer w10: U2.37 3458.07,3341.85 3458.07,3313.8 3465.87,3306 3549,3306 3746.52,3503.52 R7.2 3746.52,3631.77 3759.41,3644.66 Q3.1
RESET: C12.1 PROGRAMMING.1 R1.1 S1.1 U2.7 | length 2120.7
  Top Layer w10: v1(3328,3024) 3331.72,3020.28 3331.72,2993.84 3331.72,2990.85 3331.72,2946.02 3357.83,2919.9 3357.83,2890.91 U2.7 ; 3332.87,2993.84 3335.43,2991.28 3336.28,2991.28 3409,3064 3438.45,3064 3682.72,2819.73 3682.72,2791.28 3711.72,2762.28 3711.72,2743.4 S1.1@3729.53,2725.58 ; R1.1 3614.06,2645.48 C12.1 3641.68,2673.1 3663.27,2673.1 3715.75,2725.58 S1.1@3729.53,2725.58 ; S1.1@4087.8,2725.58 S1.1@3729.53,2725.58
  Bottom Layer w10: PROGRAMMING.1 2732,2960 2732,3056.14 2737.86,3062 2800.5,3062 2837.22,3098.72 3189.02,3098.72 3208.45,3079.28 3272.72,3079.28 v1(3328,3024)
RX: PROGRAMMING.2 U2.59 | length 430.2
  Top Layer w10: v1(3005,3048) 3035,3018 3054.27,3018 3103.43,3067.17 U2.59
  Bottom Layer w10: PROGRAMMING.2 2789,3013 2824,3048 v1(3005,3048)
SWCLK: PROGRAMMING.4 U2.49 | length 530.2
  Top Layer w10: U2.49 3200.98,3264.02 v1(3225,3240)
  Bottom Layer w10: PROGRAMMING.4 3198,3213 v1(3225,3240)
SWDIO: PROGRAMMING.5 U2.46 | length 608.5
  Top Layer w10: U2.46 3280.91,3341.85 3280.91,3305.17 3304,3282.08 v1(3304,3282)
  Bottom Layer w10: PROGRAMMING.5 2789.7,3313 2820.7,3282 v1(3304,3282)
TX: PROGRAMMING.3 U2.58 | length 525.5
  Top Layer w10: U2.58 3196.85,3086.85 v1(3222,3112)
  Bottom Layer w10: PROGRAMMING.3 2792.27,3113 2806.27,3127 3200.12,3127 3215.12,3112 v1(3222,3112)
pads on no net: T1.3 T1.4 T1.5 T1.6 T1.7 T1.8 U2.1

## Polygon pours and split planes (outlines as drawn)
GND on Bottom Layer "GND_L02_P000" (solid, remove dead copper, pour order 0): 2701.5,4152 2701.5,2118 4665,2118 4665,4152
3V3 on Bottom Layer "3V3_L02_P005" (solid, pour order 5): 4616,2709 4616,2436 4933,2436 4933,2710
3V3 on Top Layer "3V3_L01_P002" (solid, pour order 2): 4620,2709 4620,2436 4937,2436 4937,2710

## Keep-outs
Bottom Layer:
  region: 4313.25,3822 4314.75,3820.5 4314.75,2884 4680,2884 4680,3819.81
  region: 4542.75,2810.49 4542.75,2325 4672,2325 4672,2809.71
  region: 2705,3448.91 2705,2872.75 2834.25,2872.75 2834.25,3448.14
  region: 2700,2223 2701.5,2221.5 2701.5,2118 4552,2118 4543,2127 4543,2212
Keep-Out Layer:
  the board outline again, w7.87

## Silkscreen, mask and mechanical layers (free items; w line width, h text height)
Top Overlay:
  text "PC11" at 2695,4130 h50 r270
  text "PC10" at 2795,4130 h50 r270
  text "PA15" at 2895,4130 h50 r270
  text "CANH" at 2995,4130 h50 r270
  text "CANL" at 3095,4130 h50 r270
  text "PA10" at 3195,4130 h50 r270
  text "PA9" at 3295,4130 h50 r270
  text "PA8" at 3395,4130 h50 r270
  text "PC9" at 3495,4130 h50 r270
  text "PB15" at 3595,4130 h50 r270
  text "PB14" at 3695,4130 h50 r270
  text "PB13" at 3795,4130 h50 r270
  text "PB12" at 3895,4130 h50 r270
  text "PB11" at 3995,4130 h50 r270
  text "PB10" at 4095,4130 h50 r270
  text "PB2" at 4195,4130 h50 r270
  text "PB1" at 4295,4130 h50 r270
  text "PB0" at 4395,4130 h50 r270
  text "PC5" at 4495,4130 h50 r270
  text "PC4" at 4595,4130 h50 r270
  text "+" at 4524,3650.67 h50
  text "-" at 4633,3651.01 h50
  text "GND" at 2856,3487 h50
  text "3V3" at 2855,3378 h50
  text "SWDIO" at 2855,3291 h50
  text "SWCLK" at 2855,3190 h50
  text "TX" at 2857,3091 h50
  text "RX" at 2861,2994 h50
  text "NRST" at 2849,2890 h50
  text "PC12" at 2695,2420 h50 r270
  text "PC13" at 3395,2420 h50 r270
  text "PC14" at 3495,2420 h50 r270
  text "PC15" at 3595,2420 h50 r270
  text "PD2" at 2795,2380 h50 r270
  text "PB3" at 2895,2380 h50 r270
  text "PB4" at 2995,2380 h50 r270
  text "PB5" at 3095,2380 h50 r270
  text "PB8" at 3195,2380 h50 r270
  text "PB9" at 3295,2380 h50 r270
  text "PC0" at 3695,2380 h50 r270
  text "PC1" at 3795,2380 h50 r270
  text "PC2" at 3895,2380 h50 r270
  text "PC3" at 3995,2380 h50 r270
  text "PA0" at 4095,2380 h50 r270
  text "PA1" at 4195,2380 h50 r270
  text "PA2" at 4295,2380 h50 r270
  text "PA3" at 4395,2380 h50 r270
  text "5V" at 4495,2380 h50 r270
  text "GND" at 4595,2380 h50 r270
Bottom Overlay:
  drawing of 10 lines, arcs and shapes, not listed
  text "F405 Dev Board / Alfonso Faria Espinoza" at 4929,2984 h60